# Altium PCB HGCD.PcbDoc
Units mm, origin at the board's own origin, x right, y up, seen from the top; angles counter-clockwise.
Board outline 152.4 x 101.6 mm, 4 copper layers (Top layer, Ground Plane, Power Plane, Bottom layer), stack 0.844 mm thick; 79 components, 62 nets, 344 pads, 24 vias.
Unrouted connection lines stored in the file: 63.
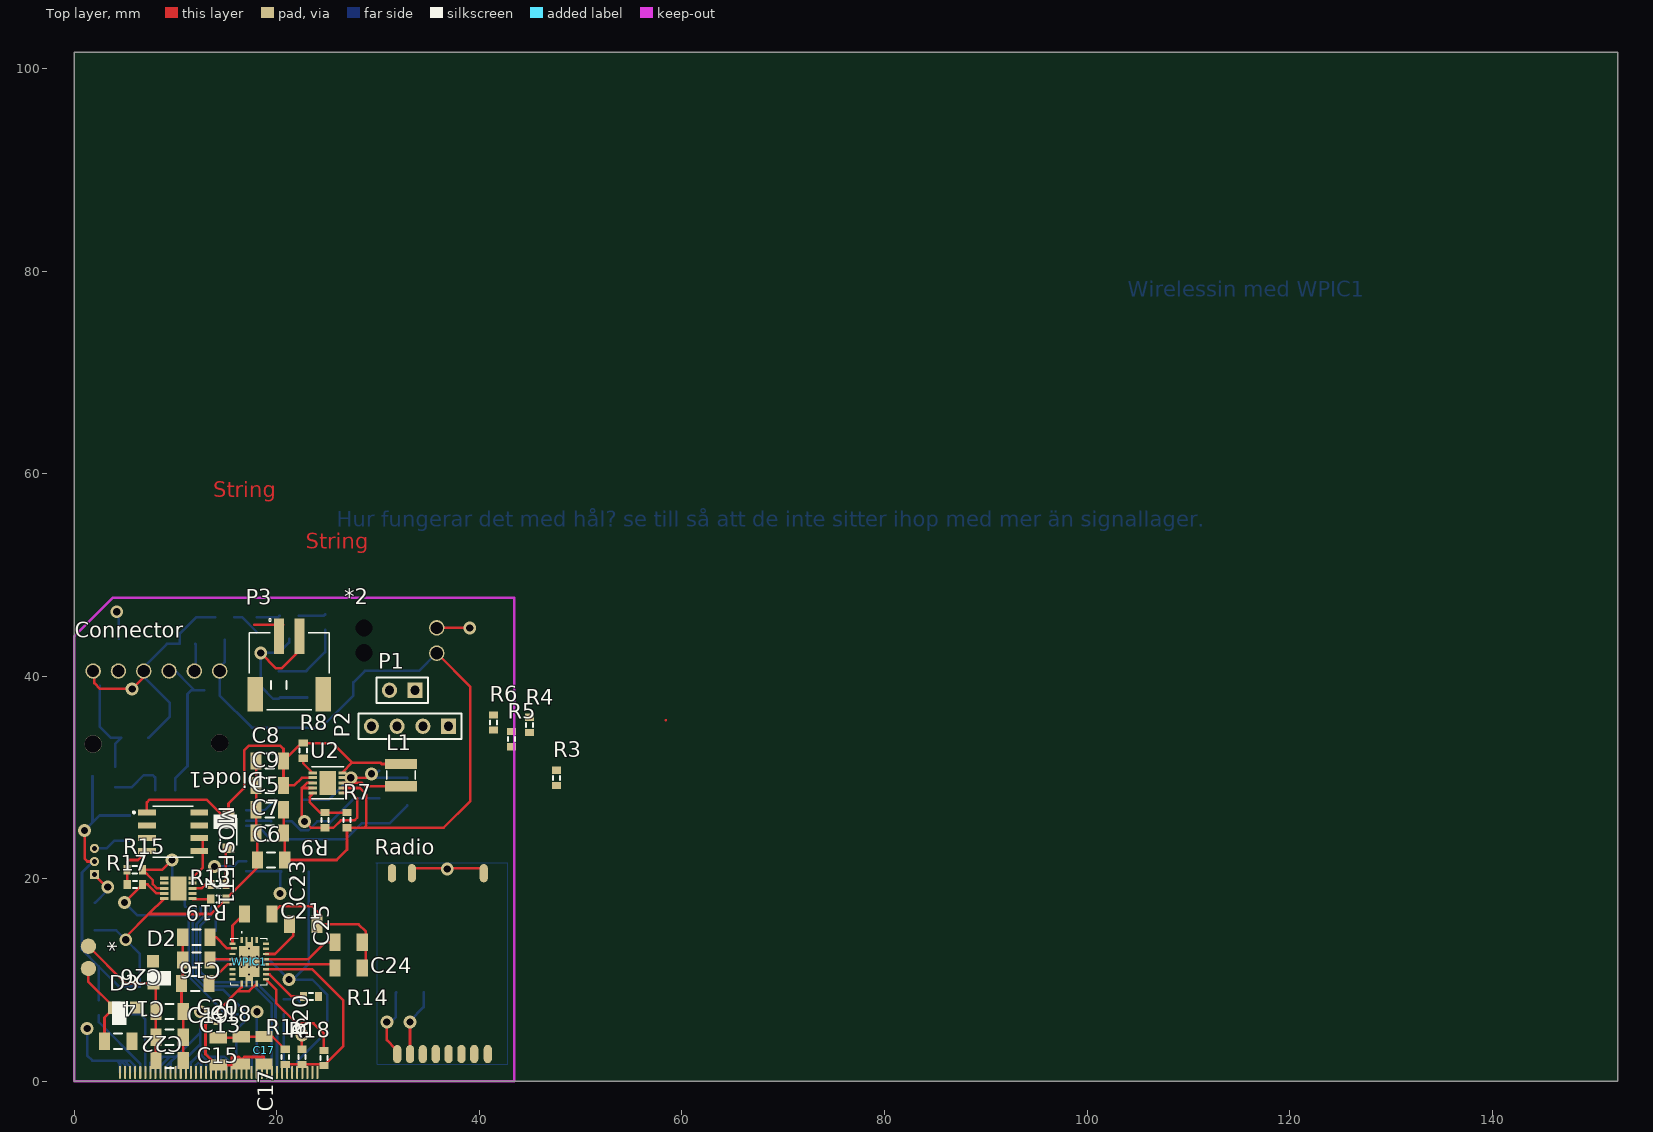
[diagram p0: Top layer view]
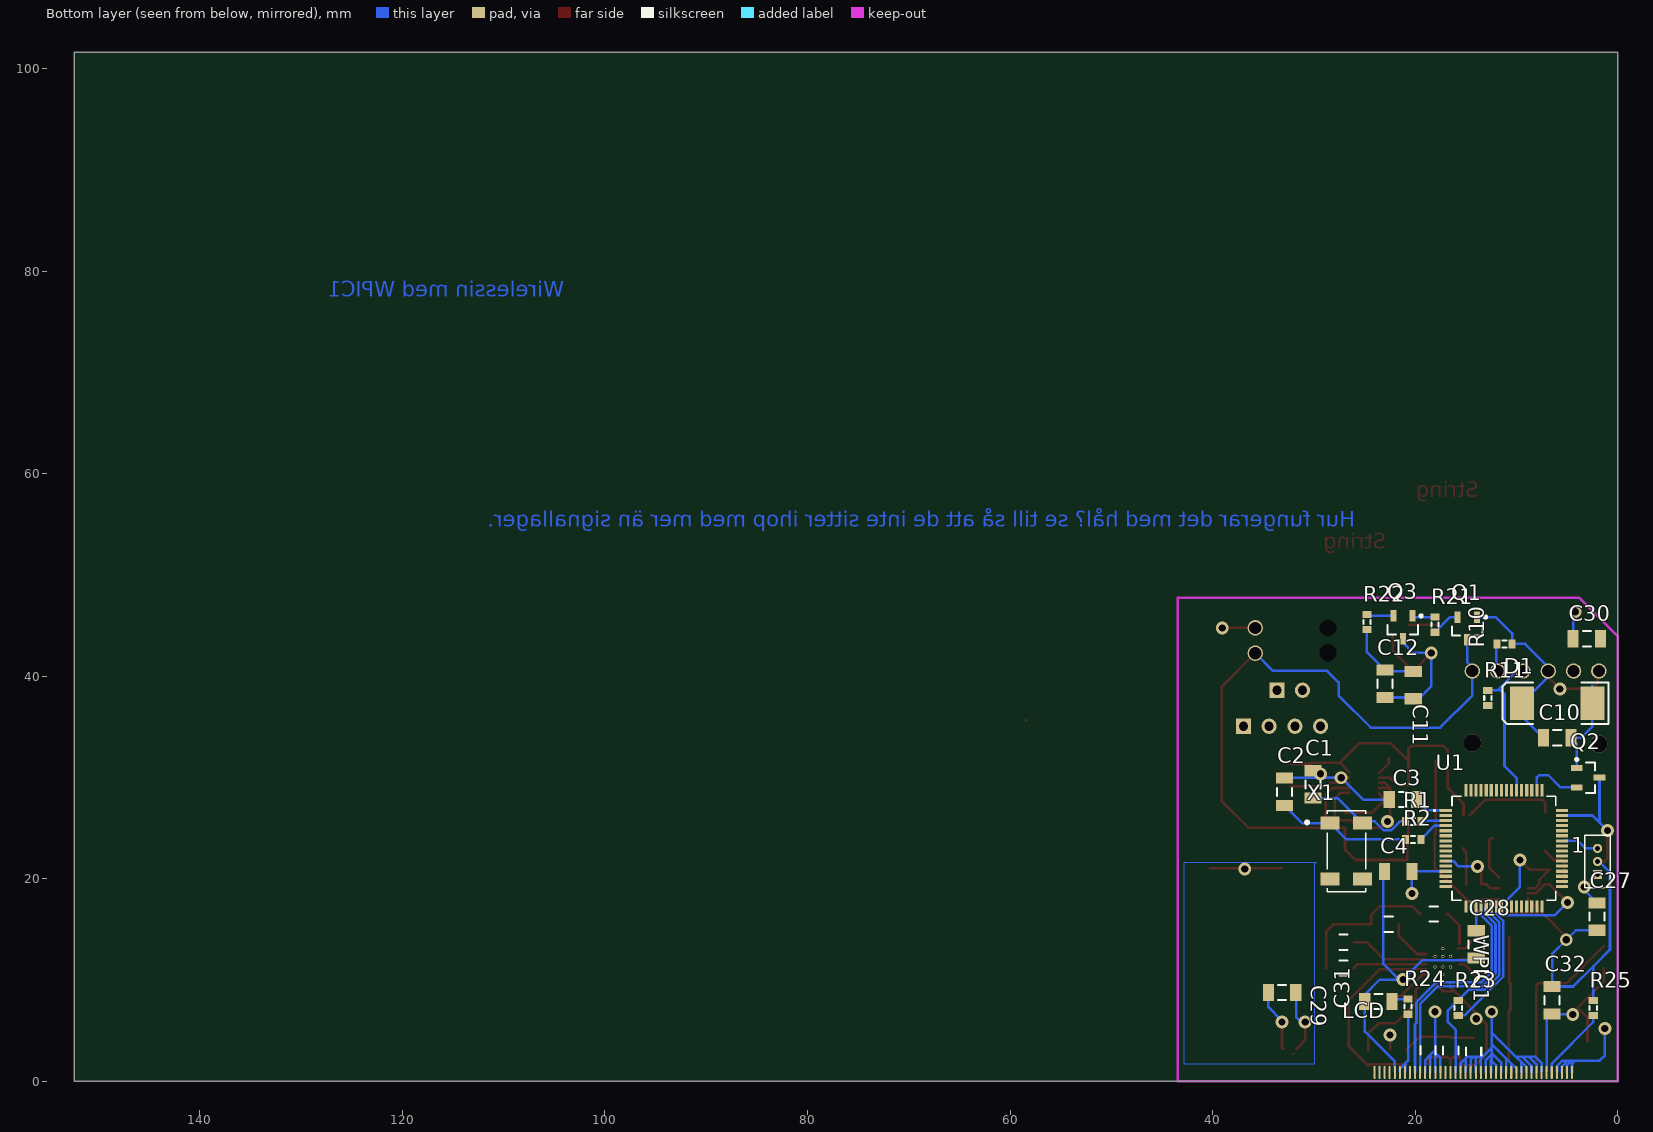
[diagram p1: Bottom layer view, seen from below]
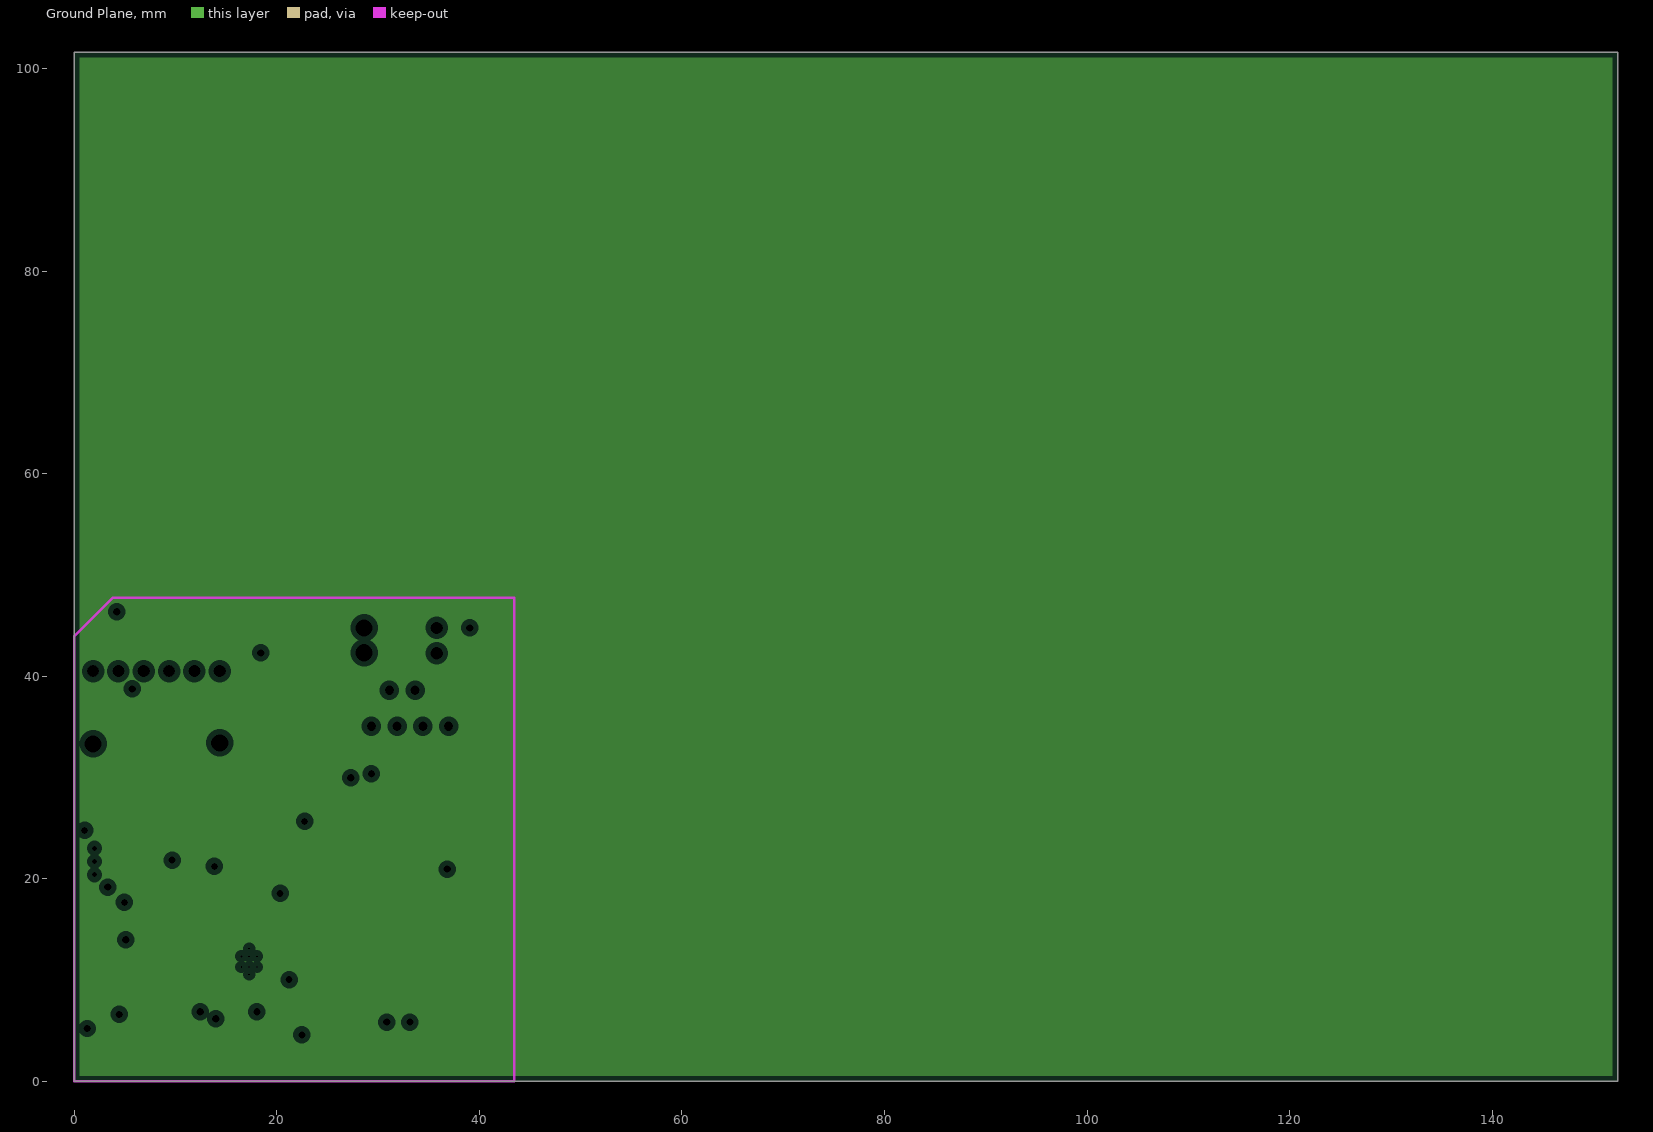
[diagram p2: Ground Plane, clearances drawn from the general rule]
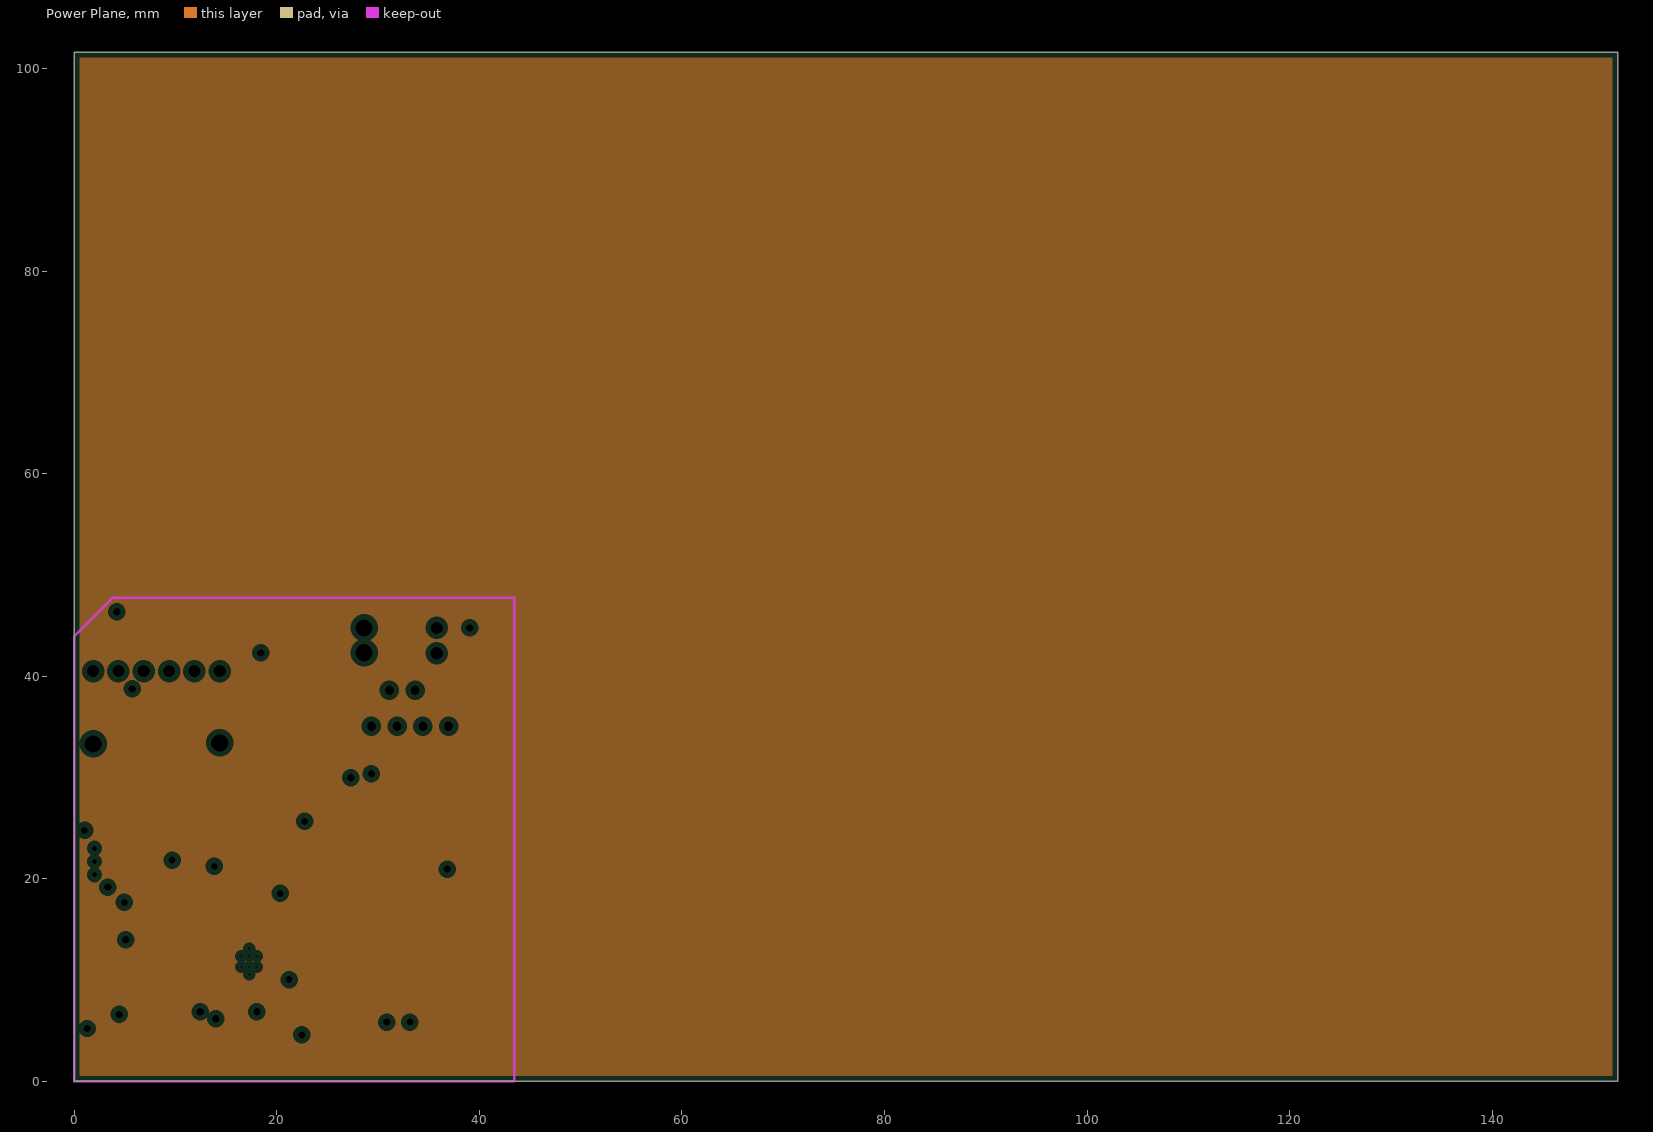
[diagram p3: Power Plane, clearances drawn from the general rule]

## Layer stack, top to bottom
Top Solder: solder mask 0.0102, Solder Resist, Dk 3.5
Top layer: signal copper 0.0356
Dielectric 1: core 0.32, FR-4, Dk 4.8
Ground Plane: plane copper 0.036
Dielectric 3: prepreg 0.127, Dk 4.2
Power Plane: plane copper 0.036
Dielectric 4: core 0.254, Dk 4.2
Bottom layer: signal copper 0.0356
Bottom Solder: solder mask 0.0102, Solder Resist, Dk 3.5

## Board outline
0,0 152.4,0 152.4,101.6 0,101.6

## Design rules (kind name [scope] priority, off if disabled: settings)
Clearance [All] p1: gap=0.127 ignorepadtopadclearanceinfootprint=FALSE
PlaneClearance [All] p1: clearance=0.508
PlaneConnect [All] p1: planeconnectstyle=Relief reliefexpansion=0.508 reliefentries=4 reliefconductorwidth=0.254 reliefairgap=0.254
PolygonConnect [All] p1: connectstyle=Relief reliefconductorwidth=0.254 reliefentries=4 polygonreliefangle="90 Angle" airgapwidth=0.254
RoomDefinition ZigBee [InComponentClass('ZigBee')] p1: confinementstyle=ConfineIn formatcopy=TRUE lockcomponents=FALSE outline 153.543,91.821 169.672,91.821 169.672,115.57 153.543,115.57
RoomDefinition WCcircuit [InComponentClass('WCcircuit')] p2: confinementstyle=ConfineIn formatcopy=TRUE lockcomponents=FALSE outline 153.543,79.375 352.806,79.375 352.806,90.551 153.543,90.551
RoomDefinition TPS6120x [InComponentClass('TPS6120x')] p3: confinementstyle=ConfineIn formatcopy=TRUE lockcomponents=FALSE outline 153.543,71.247 224.028,71.247 224.028,78.105 153.543,78.105
RoomDefinition "TFT LCD ER-TFT018-2" [InComponentClass('TFT LCD ER-TFT018-2')] p4: confinementstyle=ConfineIn formatcopy=TRUE lockcomponents=FALSE outline 154.178,46.597 176.784,46.597 176.784,69.838 154.178,69.838
RoomDefinition STM32 [InComponentClass('STM32')] p5: confinementstyle=ConfineIn formatcopy=TRUE lockcomponents=FALSE outline 153.543,28.829 220.98,28.829 220.98,45.593 153.543,45.593
RoomDefinition Magnetometer [InComponentClass('Magnetometer')] p6: confinementstyle=ConfineIn formatcopy=TRUE lockcomponents=FALSE outline 153.289,21.814 157.861,21.814 157.861,27.529 153.289,27.529
RoomDefinition connectors [InComponentClass('connectors')] p7: confinementstyle=ConfineIn formatcopy=TRUE lockcomponents=FALSE outline 153.543,1.524 201.295,1.524 201.295,20.574 153.543,20.574
RoutingVias [All] p1: holewidth=0.711 width=1.27 viastyle="Through Hole" minholewidth=0.711 minwidth=1.27 maxholewidth=0.711 maxwidth=1.27
SolderMaskExpansion [All] p1: expansion=0.102
Width [All] p1: maxlimit=0.254 minlimit=0.254 preferedwidth=0.254
28 further rules are at their usual default settings.

## Classes and differential pairs
component class ZigBee: C29 Radio
component class WCcircuit: 2 * C11 C12 C13 C14 C15 C16 C17 C18 C19 C20 C21 C22 C23 C24 C25 C26 D2 D3 Diode1 MOSFET1 P3 R13 R14 R15 R16 R17 R18 R19 R20 WPIC1
component class TPS6120x: C5 C6 C7 C8 C9 L1 Q1 Q3 R7 R8 R9 R21 R22 U2
component class "TFT LCD ER-TFT018-2": C31 C32 LCD R23 R24 R25
component class STM32: C1 C2 C3 C4 C28 P1 P2 R1 R2 R3 R4 R5 R6 U1 X1
component class Magnetometer: 1 C27
component class connectors: *2 C10 C30 Connector D1 Q2 R10 R11

## Components (designator, comment, footprint, x,y, rotation, side; value= is the part's Value field where it differs from the comment)
1 "magnometer" SIP-3 1.993,20.395 r90 bottom
2 "MCP73837T-FCI/MF" DFN300X300X100-11N 10.287,19.05 r0 top
* "WirelessIn" WIRELESSIN 1.397,12.23 r180 top
*2 "Connector button" BUTTON_CONNECTOR 35.789,42.266 r90 top
C1 "Cap Semi" C1206 30.099,29.312 r270 bottom value=100pF
C2 "Cap Semi" C1206 32.893,28.575 r270 bottom value=100pF
C3 "Cap Semi" C1206 21.209,27.813 r180 bottom value=100pF
C4 "Cap Semi" C1206 21.668,20.701 r180 bottom value=100pF
C5 "Cap Semi" C1206 19.304,26.797 r180 top value=100pF
C6 "Cap Semi" C1206 19.431,21.844 r0 top value=100pF
C7 "Cap Semi" C1206 19.304,24.511 r0 top value=100pF
C8 "Cap Semi" C1206 19.304,31.623 r180 top value=100pF
C9 "Cap Semi" C1206 19.304,29.21 r0 top value=100pF
C10 "Cap Semi" C1206 5.969,33.909 r180 bottom value=100pF
C11 "Cap Semi" C1206 20.193,39.116 r90 bottom value=100pF
C12 "Cap Semi" C1206 22.987,39.243 r90 bottom value=100pF
C13 "Cap Semi" C1206 9.411,4.335 r0 top value=100pF
C14 "Cap Semi" C1206 11.938,9.652 r0 top value=100pF
C15 "Cap Semi" C1206 9.411,2.049 r0 top value=100pF
C16 "Cap Semi" C1206 12.065,14.224 r0 top value=100pF
C17 "Cap Semi" C1206 18.733,3.065 r90 top value=100pF
C18 "Cap Semi" C1206 16.478,3.04 r90 top value=100pF
C19 "Cap Semi" C1206 14.224,2.938 r90 top value=100pF
C20 "Cap Semi" C1206 9.411,6.875 r0 top value=100pF
C21 "Cap Semi" C1206 18.161,16.51 r180 top value=100pF
C22 "Cap Semi" C1206 4.331,3.954 r0 top value=100pF
C23 "Cap Semi" C1206 22.604,15.494 r180 top value=100pF
C24 "Cap Semi" C1206 27.086,11.176 r180 top value=100pF
C25 "Cap Semi" C1206 27.086,13.716 r180 top value=100pF
C26 "Cap Semi" C1206 12.065,11.97 r0 top value=100pF
C27 "Cap Semi" C1206 2.032,16.256 r90 bottom value=100pF
C28 "Cap Semi" C1206 13.97,13.509 r90 bottom value=100pF
C29 "Cap Semi" C1206 33.147,8.763 r0 bottom value=100pF
C30 "Cap Semi" C1206 3.048,43.688 r180 bottom value=100pF
C31 "Cap Semi" C1206 23.622,7.874 r180 bottom value=100pF
C32 "Cap Semi" C1206 6.477,8.001 r270 bottom value=100pF
Connector "ConnectorWtoB" CONNECTOR_WIRE_TO_PCB -0.643,40.504 r180 top
D1 "Diode" SMC 5.969,37.338 r0 bottom
D2 "DIODE  PTVS12S1UR" PTVS12S1UR 7.728,11.843 r0 top
D3 "DIODE  PTVS12S1UR" PTVS12S1UR 6.124,7.336 r270 top
Diode1 "Diod MBR0520L-TP" SOD3716X135N 15.228,24.638 r270 top
L1 "744025002" WE-TPC_2828 32.258,30.226 r180 top value=2.2uH
LCD "TFT LCD ER-TFT018-2" "LCD TFT DISPLAY" 14.012,2.768 r90 bottom
MOSFET1 "fds9431a" SOIC127P600X175-8N 9.76,24.638 r0 top
P1 "Header 2" HDR1X2 33.655,38.608 r180 top
P2 "Header 4" HDR1X4 36.957,35.052 r180 top
P3 "S2B-PH-K-S(LF)(SN)" JST_S2B-PH-K-S(LF)(SN) 20.825,40.142 r180 top
Q1 "PNP" SOT-23B_N 14.859,44.704 r270 bottom
Q2 "QNPN" SOT-23B_N 2.921,29.972 r180 bottom
Q3 "QNPN" SOT-23B_N 21.209,44.831 r270 bottom
R1 "Res3" J1-0603 20.193,25.654 r0 bottom value=1K
R2 "Res3" J1-0603 20.193,23.876 r0 bottom value=1K
R3 "Res3" J1-0603 47.625,29.96 r270 top value=1K
R4 "Res3" J1-0603 44.958,35.191 r270 top value=1K
R5 "Res3" J1-0603 43.18,33.782 r270 top value=1K
R6 "Res3" J1-0603 41.402,35.433 r270 top value=1K
R7 "Res3" J1-0603 26.924,25.781 r270 top value=1K
R8 "Res3" J1-0603 22.606,32.639 r270 top value=1K
R9 "Res3" J1-0603 24.765,25.781 r90 top value=1K
R10 "Res3" J1-0603 11.178,43.18 r0 bottom value=1K
R11 "Res3" J1-0603 12.827,37.846 r270 bottom value=1K
R13 "Res3" J1-0603 14.224,17.977 r0 top value=1K
R14 "Res3" J1-0603 23.368,8.382 r0 top value=1K
R15 "Res3" J1-0603 5.969,20.885 r0 top value=1K
R16 "Res3" J1-0603 20.828,2.408 r90 top value=1K
R17 "Res3" J1-0603 5.981,19.431 r0 top value=1K
R18 "Res3" J1-0603 24.638,2.293 r270 top value=1K
R19 "Res3" J1-0603 14.224,19.431 r180 top value=1K
R20 "Res3" J1-0603 22.479,2.408 r270 top value=1K
R21 "Res3" J1-0603 18.034,45.085 r270 bottom value=1K
R22 "Res3" J1-0603 24.765,45.339 r90 bottom value=1K
R23 "Res3" J1-0603 15.748,7.239 r90 bottom value=1K
R24 "Res3" J1-0603 20.701,7.366 r270 bottom value=1K
R25 "Res3" J1-0603 2.413,7.239 r270 bottom value=1K
Radio "RF2401F20" RF2401F20 34.29,5.08 r90 top
U1 "STM32L476RX" LQFP64-10x10mm 11.233,22.987 r180 bottom value=Value
U2 "TPS61200DRCR" SON50P300X300X100-11N 25.019,29.464 r180 top
WPIC1 "bq51013B" CONTROLLER_MSP430FR2522IRHLT 17.272,11.811 r0 top
X1 "ABS25-32-768KHZ-T" XTAL_ABS25-32-768KHZ-T 26.797,22.733 r180 bottom

## Footprints (in the part's own frame and the unit in brackets; to place one, negate y for a bottom-side part, rotate by r counter-clockwise, add the part's x,y. Pads: shape width x height; smd on the part's side, far side on the other; paste and mask are expansions set on the pad)
BUTTON_CONNECTOR [mm]
  round 1.524 hole 1.2: 1(0,0) 2(2.5,0)
  round 1.524 hole 1.7: 25(0.04,7.18) 25(2.5,7.18)
C1206 [mm] "Chip Capacitor, Body 3.2x1.6mm, IPC High Density"
  rect 1.1x1.7 smd: 1(-1.35,0) 2(1.35,0)
  silkscreen extent -0.4,-0.75 0.4,0.75, body extent -1.7,-0.9 1.7,0.9, height 1.3
CONNECTOR_WIRE_TO_PCB [mm]
  round 1.524 hole 1.2: 1(-15,0) 2(-12.5,0) 3(-10,0) 4(-7.5,0) 5(-5,0) 6(-2.5,0)
  round 1.7 hole 1.7: hole1(-15,7.1) hole2(-2.5,7.2)
  Top layer lines w0.254: -15,0 -15,0
CONTROLLER_MSP430FR2522IRHLT [mm]
  rect 0.24x0.6 smd: 1(-0.75,2.15) 10(-0.75,-2.15) 11(0.75,-2.15) 20(0.75,2.15)
  rect 0.6x0.24 smd: 2(-1.65,1.75) 3(-1.5,1.3) 4(-1.65,0.75) 5(-1.65,0.25) 6(-1.65,-0.25) 7(-1.65,-0.75) 8(-1.65,-1.25) 9(-1.65,-1.75) 12(1.65,-1.75) 13(1.65,-1.25) 14(1.65,-0.75) 15(1.65,-0.25) 16(1.65,0.25) 17(1.65,0.75) 18(1.65,1.25) 19(1.65,1.75)
  round 0.3 hole 0.2: 21(-0.775,-0.525) 21(-0.775,0.525) 21(0,-1.275) 21(0,-0.525) 21(0,0.525) 21(0,1.275) 21(0.775,-0.525) 21(0.775,0.525)
  rect 0.2x0.525 smd: 21(-0.275,-2.187) 21(-0.275,2.187) 21(0.275,-2.187) 21(0.275,2.187)
  rect 0.75x0.4 smd: 21(0,-1.725) 21(0,1.725)
  rect 2.05x3.05 smd: 21(0,0)
  silkscreen extent -1.8,-2.3 1.8,2.95
DFN300X300X100-11N [mil]
  rect 32x12 smd: 1(-55,39) 2(-55,20) 3(-55,0) 4(-55,-20) 5(-55,-39) 6(55,-39) 7(55,-20) 8(55,0) 9(55,20) 10(55,39)
  rect 62x93 smd: 11(0,0)
HDR1X2 [mm] "Connector; Header; 2 Position"
  rect 1.5x1.5 hole 0.9: 1(0,0)
  round 1.5 hole 0.9: 2(2.54,0)
  silkscreen extent -1.27,-1.27 3.81,1.27
HDR1X4 [mm] "Connector; Header; 4 Position"
  rect 1.5x1.5 hole 0.9: 1(0,0)
  round 1.5 hole 0.9: 2(2.54,0) 3(5.08,0) 4(7.62,0)
  silkscreen extent -1.27,-1.27 8.89,1.27
J1-0603 [mm] "Chip Resistor, Body 1.6x0.8mm, IPC High Density"
  rect 0.7x0.9 smd: 1(-0.75,0) 2(0.75,0)
  silkscreen extent -0.2,-0.35 0.2,0.35, body extent -0.85,-0.48 0.85,0.48, height 0.9
JST_S2B-PH-K-S(LF)(SN) [mm]
  rect 1x3.5 smd: 1(0.6,-3.8) 2(-1.4,-3.8)
  rect 1.5x3.4 smd: P1(2.95,1.95) P2(-3.75,1.95)
  silkscreen extent -4.35,-5.53 3.55,3.45
"LCD TFT DISPLAY" [mm]
  rrect50% 1.25x0.2 all layers, no hole: 1(-1.9,10) 2(-1.9,9.5) 3(-1.9,9) 4(-1.9,8.5) 5(-1.9,8) 6(-1.9,7.5) 7(-1.9,7) 8(-1.9,6.5) 9(-1.9,6) 10(-1.9,5.5) 11(-1.9,5) 12(-1.9,4.5) 13(-1.9,4) 14(-1.9,3.5) 15(-1.9,3) 16(-1.9,2.5) 17(-1.9,2) 18(-1.9,1.5) 19(-1.9,1) 20(-1.9,0.5) 21(-1.9,0) 22(-1.9,-0.5) 23(-1.9,-1) 24(-1.9,-1.5) 25(-1.9,-2) 26(-1.9,-2.5) 27(-1.9,-3) 28(-1.9,-3.5) 29(-1.9,-4) 30(-1.9,-4.5) 31(-1.9,-5) 32(-1.9,-5.5) 33(-1.9,-6) 34(-1.9,-6.5) 35(-1.9,-7) 36(-1.9,-7.5) 37(-1.9,-8) 38(-1.9,-8.5) 39(-1.9,-9) 40(-1.9,-9.5)
  rect 3x2 on Bottom Solder: SMD1(0.3,11.6) SMD2(0.4,-11.1)
LQFP64-10x10mm [mm]
  rect 1.194x0.305 smd: 1(-5.75,3.75) 2(-5.75,3.25) 3(-5.75,2.75) 4(-5.75,2.25) 5(-5.75,1.75) 6(-5.75,1.25) 7(-5.75,0.75) 8(-5.75,0.25) 9(-5.75,-0.25) 10(-5.75,-0.75) 11(-5.75,-1.25) 12(-5.75,-1.75) 13(-5.75,-2.25) 14(-5.75,-2.75) 15(-5.75,-3.25) 16(-5.75,-3.75) 33(5.75,-3.75) 34(5.75,-3.25) 35(5.75,-2.75) 36(5.75,-2.25) 37(5.75,-1.75) 38(5.75,-1.25) 39(5.75,-0.75) 40(5.75,-0.25) 41(5.75,0.25) 42(5.75,0.75) 43(5.75,1.25) 44(5.75,1.75) 45(5.75,2.25) 46(5.75,2.75) 47(5.75,3.25) 48(5.75,3.75)
  rect 0.305x1.194 smd: 17(-3.75,-5.75) 18(-3.25,-5.75) 19(-2.75,-5.75) 20(-2.25,-5.75) 21(-1.75,-5.75) 22(-1.25,-5.75) 23(-0.75,-5.75) 24(-0.25,-5.75) 25(0.25,-5.75) 26(0.75,-5.75) 27(1.25,-5.75) 28(1.75,-5.75) 29(2.25,-5.75) 30(2.75,-5.75) 31(3.25,-5.75) 32(3.75,-5.75) 49(3.75,5.75) 50(3.25,5.75) 51(2.75,5.75) 52(2.25,5.75) 53(1.75,5.75) 54(1.25,5.75) 55(0.75,5.75) 56(0.25,5.75) 57(-0.25,5.75) 58(-0.75,5.75) 59(-1.25,5.75) 60(-1.75,5.75) 61(-2.25,5.75) 62(-2.75,5.75) 63(-3.25,5.75) 64(-3.75,5.75)
  silkscreen extent -6.93,-5.13 5.13,5.13, body extent 0,0 0.25,0.25, height 0.25
PTVS12S1UR [mm]
  rect 1.2x1.2 smd: A(0.06,0) C(0.08,-2.174)
  Top layer lines w0.025: 0,-2.17 0.08,-2.174 ; 0.03,0 0.06,0
  silkscreen extent -0.5,-2.36 1.78,-1
RF2401F20 [mm]
  oval 1.8x0.8 smd: 1(-2.4,2.4) 2(-2.4,1.14) 3(-2.4,-0.12) 4(-2.39,-1.4) 5(-2.39,-2.67) 6(-2.39,-3.94) 7(-2.39,-5.2) 8(-2.39,-6.54) 9(15.46,2.92) 10(15.46,0.96) 11(15.46,-6.14)
  Top layer region: -5.1,4.9
  Top layer lines w0.025: -2.4,2.48 -2.4,2.4 ; -2.4,2.09 -2.4,2.163 ; -2.4,2.4 -2.4,2.163 ; -2.4,2.4 -2.4,2.163
  Bottom layer lines w0.025: -3.4,4.4 16.4,4.4 16.5,4.5 16.5,-8.5 -3.4,-8.5 ; -3.39,4.37 -3.39,-8.53
SIP-3 [mm]
  rect 0.9x0.9 hole 0.5: 1(0,0)
  round 0.9 hole 0.5: 2(1.3,0) 3(2.6,0)
  silkscreen extent -1.27,-1.27 3.9,1.27
SMC [mm] "DO-214-AB/SMC; 2 C-Bend Leads; Body 7.9 x 5.9 mm, inc. leads (LxW)"
  rect 2.4x3.3 smd: 1(-3.475,0) 2(3.475,0)
  silkscreen extent -5.07,-2.05 5.43,2.05
SOD3716X135N [mm]
  rect 0.91x1.22 smd: A(1.635,0) C(-1.635,0)
  silkscreen extent -1.66,-1.48 1.35,0.8
SOIC127P600X175-8N [mm]
  rect 1.75x0.59 smd: 1(-2.585,1.905) 2(-2.585,0.635) 3(-2.585,-0.635) 4(-2.585,-1.905) 5(2.585,-1.905) 6(2.585,-0.635) 7(2.585,0.635) 8(2.585,1.905)
  silkscreen extent -3.97,-2.5 2,2.5
SON50P300X300X100-11N [mil]
  rect 32x12 smd: 1(-58,39) 2(-58,20) 3(-58,0) 4(-58,-20) 5(-58,-39) 6(58,-39) 7(58,-20) 8(58,0) 9(58,20) 10(58,39)
  rect 65x94 smd: 11(0,0)
  silkscreen extent -62,-62 62,62
SOT-23B_N [mm] "SOT23, 3-Leads, Body 2.9x1.3mm, Pitch 0.95mm, Lead Span 2.4mm, IPC Medium Density"
  rect 1.15x0.6 smd: 1(-1.125,0.95) 2(-1.125,-0.95) 3(1.125,0)
  silkscreen extent -1.25,-1.5 0.7,1.92, body extent -0.7,-1.5 0.7,1.5, height 1.14
WE-TPC_2828 [mm] "Power Inductor, SMD, 2-Leads, body 2.8x2.8mm"
  rect 3.2x1 smd: 1(0,1.1) 2(0,-1.1)
  silkscreen extent -1.4,-0.43 1.4,0.43, body extent -1.4,-1.4 1.4,1.4, height 2.82
WIRELESSIN [mil]
  round 60 smd: 1(0,43.31) 2(0,-43.31)
XTAL_ABS25-32-768KHZ-T [mm]
  rect 1.9x1.3 smd: 1(-1.6,2.75) 2(-1.6,-2.75) 3(1.6,-2.75) 4(1.6,2.75)
  silkscreen extent -4.02,-4 1.9,4

## Part data
2: "MCP73837 Series 6 V Linear Battery Charge Controller Surface Mount - DFN-10", Package="DFN-10 Microchip", Availability=Good, MF=Microchip, MP=MCP73837T-FCI/MF, Price="0.98 USD", SnapEDA_Link=https://www.snapeda.com/symbols-footprints/MCP73837T-FCI/MF/Microchip/view-part/?ref=snap
C1 C2 C3 C4 C5 C6 C7 C8 C9 C10 C11 C12 C13 C14 C15 C16 C17 C18 C19 C20 C21 C22 C23 C24 C25 C26 C27 C28 C29 C30 C31 C32: "Capacitor (Semiconductor SIM Model)", LatestRevisionDate=29-May-2009, LatestRevisionNote="IPC-7351 Footprint Added.", PackageDescription="Chip Capacitor", PackageReference=C1206, Published=8-Jun-2000, Publisher="Altium Limited"
D1: "Default Diode", Code_JEDEC=DO-214-AB, LatestRevisionDate=17-Jul-2002, LatestRevisionNote="Re-released for DXP Platform.", PackageDescription="DO-214-AB/SMC; 2 C-Bend Leads; Body 7.9 x 5.9 mm, inc. leads (LxW)", PackageReference=SMC, PackageVersion=Sep-1996, Published=8-Jun-2000, Publisher="Altium Limited"
L1: "WE-TPC SMD Shielded Tiny Power Inductor, size 2828, 1.8A, 57mO, 2.2uH", DC Resistance=57mO, Rated Current=1.8A, ComponentLink1Description=Manufacturer, ComponentLink1URL=http://www.we-online.de, ComponentLink2Description=Datasheet, ComponentLink2URL=http://katalog.we-online.de/pbs/datasheet/744025002.pdf, Part Number=744025002, Published Date="July 2017", Publisher="Wurth Elektronik", Size=2828
P1: "Header, 2-Pin", LatestRevisionDate=17-Jul-2002, LatestRevisionNote="Re-released for DXP Platform.", Publisher="Altium Limited"
P2: "Header, 4-Pin", LatestRevisionDate=17-Jul-2002, LatestRevisionNote="Re-released for DXP Platform.", Publisher="Altium Limited"
P3: "Header Side Entry 2way", Package=None, Availability=Good, MF=JST, MP="S2B-PH-K-S (LF)(SN)", Price="0.12 USD", SnapEDA_Link=https://www.snapeda.com/symbols-footprints/S2B-PH-K-S%20%28LF%29%28SN%29/JST/view-part/?ref=snap
Q1: "PNP Bipolar Transistor", LatestRevisionDate=29-May-2009, LatestRevisionNote="IPC-7351 Footprint Added.", PackageDescription="3-Pin SOT-23 Package 0.95 mm Pitch, 2.4 mm Lead Span", PackageReference=SOT-23B, PackageVersion=Aug-1999, Published=8-Jun-2000, Publisher="Altium Limited"
Q2 Q3: "NPN Bipolar Transistor", LatestRevisionDate=29-May-2009, LatestRevisionNote="IPC-7351 Footprint Added.", PackageDescription="3-Pin SOT-23 Package 0.95 mm Pitch, 2.4 mm Lead Span", PackageReference=SOT-23B, PackageVersion=Aug-1999, Published=8-Jun-2000, Publisher="Altium Limited"
R1 R2 R3 R4 R5 R6 R7 R8 R9 R10 R11 R13 R14 R15 R16 R17 R18 R19 R20 R21 R22 R23 R24 R25: "Resistor", LatestRevisionDate=29-May-2009, LatestRevisionNote="IPC-7351 Footprint Added.", PackageDescription="Chip Resistor", PackageReference=J1-0603, Published=8-Jun-2000, Publisher="Altium Limited"
U1: "Imported", Manufacturer_Part_Number=stm32l476rx, Copyright="Copyright (C) 2016 Accelerated Designs. All rights reserved", RefDes=RefDes, Type=Type, Vendor="ST Microelectronics"
U2: "0.3V Input Voltage Boost Converter with 1.3A Switches and 'Down Mode' in 3x3 QFN 10-VSON -40 to 85", Package="VFDFN-10 Texas Instruments", Availability=Good, MF="Texas Instruments", MP=TPS61200DRCR, Price="1.71 USD", SnapEDA_Link=https://www.snapeda.com/symbols-footprints/TPS61200DRCR/Texas%20Instruments/view-part/?ref=snap
X1: Package=None, Availability=Unavailable, MF=Abracon, MP=ABS25-32-768KHZ-T, Price=None, SnapEDA_Link=https://www.snapeda.com/symbols-footprints/ABS25-32-768KHZ-T/Abracon/view-part/?ref=snap

## Via types
v1: diameter 1.27/1.27 (per signal layer), hole 0.711, Top layer to Bottom layer, 15 vias
v2: diameter 1.27, hole 0.711, Top layer to Bottom layer, 9 vias

## Nets (pads, with @x,y where several pads share a name; then routed paths per layer and width w, separated by ;. In a path a pad name is that pad's centre, name@x,y a point inside that pad or via, vN(x,y) a via of type N, cw(c..) or ccw(c..) an arc to the next point about the centre after c; other vN are vias at no path point)
"CS LCD": LCD.9 U1.20 | length 22.5
  Bottom layer w0.254: U1.20 13.483,16.404 12.446,15.367 12.446,10.795 13.462,9.779 17.907,9.779 19.866,7.82 19.866,5.788 20.012,5.642 LCD.9
GND: 1.2 2.5 C1.1 C2.1 C3.1 C4.1 C5.2 C6.1 C7.1 C8.2 C9.1 C11.1 C12.1 C17.1 C18.1 C19.1 C27.1 C28.1 C29.2 C30.1 C31.1 C32.1 D2.A D3.A LCD.5 LCD.11 LCD.12 LCD.13 LCD.14 LCD.16 LCD.18 LCD.19 LCD.20 LCD.21 LCD.22 LCD.23 LCD.24 LCD.25 LCD.26 LCD.27 LCD.28 LCD.29 LCD.30 LCD.31 LCD.32 LCD.33 LCD.34 LCD.37 LCD.38 LCD.39 LCD.40 P3.2 Q2.3 Q3.3 R9.1 R11.2 R13.2 R14.2 R20.1 R25.1 Radio.2 Radio.10 Radio.11 U1.18 U1.31 U1.47 U1.63 U2.1 U2.4 U2.8 U2.9 U2.11 WPIC1.9 WPIC1.10 WPIC1.11 WPIC1.20 | length 256.8
  Top layer w0.254: v1(1.016,24.765) 1.016,21.971 1.292,21.695 1.2 ; v1(5.08,13.97) 5.08,14.249 7.341,16.51 ; 2.5 7.341,16.51 ; WPIC1.10 16.522,9.283 16.129,8.89 ; C8.2 C9.1 C5.2 C7.1 18.081,24.384 C6.1 18.081,21.084 R13.2 13.507,16.51 7.341,16.51 ; WPIC1.11 17.251,8.89 16.129,8.89 ; v1(18.415,42.291) 19.939,40.767 20.447,40.767 22.225,42.545 P3.2 ; C17.1 18.708,1.69 18.708,2.391 16.783,2.391 16.531,2.139 16.531,1.69 16.493,1.69 16.493,2.139 16.241,2.391 15.599,2.391 15.531,2.323 15.531,1.588 C19.1 14.033,1.588 12.954,2.667 12.954,5.588 13.54,6.174 v1(13.97,6.174) 13.97,6.731 16.129,8.89 ; R20.1 v2(22.479,4.572) ; U2.9 22.479,28.956 ; U2.8 22.987,29.464 22.479,28.956 ; U2.1 27.407,28.473 ; U2.4 v1(27.305,29.972) 28.956,29.972 v1(29.337,30.353) ; 27.407,28.448 27.432,28.448 27.94,27.94 27.94,26.035 27.667,25.762 26.316,25.762 25.585,25.031 R9.1 23.356,25.031 v1(22.733,25.654) 22.479,25.908 22.479,28.956 ; Radio.2@32.988,3.188 33.147,3.347 v2(33.147,5.842) ; Radio.10@33.168,21.048 Radio.11@40.268,21.048
  Bottom layer w0.254: v1(1.016,24.765) 1.796,25.545 ; v1(1.27,5.207) 1.27,2.54 1.778,2.032 4.191,2.032 ; Q2.3@1.796,30.099 1.796,25.545 ; 1.2 1.854,21.695 0.762,20.603 0.762,12.998 2.413,11.347 ; C27.1 4.144,14.906 v1(5.08,13.97) 6.477,12.573 C32.1 4.409,9.351 2.413,11.347 ; R25.1 2.413,11.347 ; v1(4.191,46.355) 4.398,46.148 C30.1 ; LCD.40 4.512,1.711 4.191,2.032 ; LCD.39 5.012,1.592 4.572,2.032 ; U1.47 2.488,26.237 1.796,25.545 ; LCD.38 5.512,1.473 4.953,2.032 ; LCD.37@5.996,0.995 5.996,1.497 5.461,2.032 4.953,2.032 ; LCD.34@7.52,0.995 7.52,1.805 8.128,2.413 8.763,2.413 ; LCD.33 8.012,1.662 8.763,2.413 ; LCD.32 8.512,1.527 9.398,2.413 ; LCD.31 9.012,1.392 9.512,1.892 ; LCD.30 9.512,1.892 ; LCD.29 10.012,1.249 10.512,1.749 ; LCD.28 10.512,1.749 ; LCD.27 11.012,2.249 ; LCD.26 11.512,1.86 12.446,2.794 ; LCD.25 12.012,1.577 12.446,2.011 12.446,2.794 ; v1(12.446,6.858) 12.446,4.826 ; 12.509,2.603 13.012,2.101 LCD.23 ; LCD.24 12.512,2.093 ; LCD.22 13.512,2.236 13.335,2.413 ; C28.1 13.97,11.932 19.31,11.932 v1(21.209,10.033) 23.495,10.033 24.972,8.556 C31.1 24.972,4.906 22.012,1.946 22.012,1.448 22.02,1.44 LCD.5@22.02,0.995 ; LCD.21 14.012,2.244 13.843,2.413 ; LCD.20 14.512,2.125 14.224,2.413 ; LCD.19 15.012,2.26 ; LCD.18@15.504,0.868 15.504,1.768 15.012,2.26 ; LCD.14 17.512,2.272 18.012,2.772 ; LCD.13 18.012,2.772 ; v1(18.034,6.858) 18.034,3.048 ; LCD.12 18.512,2.57 ; LCD.11 19.012,2.07 18.512,2.57 ; Q3.3 21.209,43.307 20.193,42.291 v1(18.415,42.291) 18.415,38.989 19.638,37.766 C11.1 20.32,37.893 C12.1 ; v1@21.717,10.16 23.147,11.59 C4.1@23.147,20.701 ; C3.1 25.146,27.813 v1(27.305,29.972) v1@29.409,29.972 ; C1.1 v1@29.409,29.972 ; C2.1 32.846,29.972 v1@29.409,29.972 ; v2(33.147,5.842) 33.147,5.969 34.497,7.319 C29.2 ; 4.191,2.032 4.572,2.032 ; 4.572,2.032 4.953,2.032 ; 8.763,2.413 9.398,2.413 ; 9.398,2.413 10.033,2.413 ; 9.512,1.892 10.033,2.413 ; 10.033,2.413 12.446,4.826 ; 10.512,1.749 11.012,2.249 ; 11.012,2.249 12.446,3.683 ; 12.446,2.794 12.446,3.238 ; 12.446,3.238 12.446,3.683 ; 12.446,3.238 12.509,3.238 13.335,2.413 ; 12.446,3.683 12.446,4.826 ; 13.335,2.413 13.843,2.413 ; 13.843,2.413 14.224,2.413 ; 14.224,2.413 14.859,2.413 15.012,2.26 ; 18.012,2.772 18.034,2.794 18.034,3.048 ; 18.034,3.048 18.512,2.57
  other v2: 36.83,20.955
"MISO LCD": LCD.17 R23.2 U1.22 | length 20.1
  Bottom layer w0.254: U1.22 12.483,16.482 11.684,15.683 11.684,10.479 13.146,9.017 14.72,9.017 R23.2 16.764,6.973 16.764,5.842 16.012,5.09 LCD.17 ; 16.002,6.235 16.012,6.225
"MOSI LCD": R23.1 U1.23 | length 13.7
  Bottom layer w0.254: U1.23 11.983,16.521 11.303,15.84 11.303,10.322 15.12,6.504 15.733,6.504 15.844,6.616 R23.1@16.16,6.616
Net1_3: 1.3 U1.42 | length 3.8
  Bottom layer w0.254: 1.3 3.183,22.995 3.925,23.737 U1.42
Net2_1: 2.1 C11.2 C12.2 Diode1.A MOSFET1.4 R15.1 R17.1 R19.1 R22.1 WPIC1.4 | length 15.9
  Top layer w0.254: R17.1 5.219,19.443 R15.1 5.219,21.602 5.461,21.844 6.286,21.844 MOSFET1.4 ; R19.1 14.974,22.634 15.212,22.872 15.228,22.872 Diode1.A
  Bottom layer w0.254: C11.2 22.86,40.466 C12.2 24.765,42.371 R22.1
Net2_3: 2.3 R15.2 U1.25 | length 11.7
  Top layer w0.254: 2.3 8.159,19.05 7.747,19.462 7.747,19.857 R15.2 8.693,20.885 v2(9.652,21.844)
  Bottom layer w0.254: v2(9.652,21.844) 9.652,19.177 10.89,17.939 10.89,17.331 U1.25
Net2_4: 2.4 R17.2 U1.24 | length 12.9
  Top layer w0.254: v2(4.953,17.653) R17.2 7.239,19.431 8.128,18.542 2.4
  Bottom layer w0.254: v2(4.953,17.653) 6.22,16.386 11.241,16.386 11.39,16.535 11.39,17.145 U1.24@11.577,17.145
Net2_6: 2.6 R13.1 | length 1.8
  Top layer w0.254: 2.6@11.684,18.009 11.716,17.977 R13.1
Net2_8: 2.8 R19.2 U1.11 | length 7.2
  Top layer w0.254: 2.8 12.573,19.05 12.954,19.431 R19.2 13.474,20.84 v2(13.843,21.209)
  Bottom layer w0.254: v2(13.843,21.209) 15.698,21.209 16.226,21.737 U1.11
Net2_10: 2.10 MOSFET1.6 P3.1 | length 7.4
  Top layer w0.254: 2.10@11.684,20.091 12.7,21.107 12.7,23.749 12.446,24.003 MOSFET1.6 ; 17.77,45.075 P3.1@20.609,45.075
Net*2_1: *2.1 C5.1 C6.2 C7.2 Connector.1 Q1.3 R7.2 U2.2 | length 80.7
  Top layer w0.254: C5.1 20.701,26.75 20.701,24.558 C7.2 20.781,24.384 C6.2 25.908,21.844 26.924,22.86 R7.2 28.587,25.031 ; U2.2 28.194,28.956 28.829,28.321 28.829,25.273 28.587,25.031 ; *2.1 39.116,38.939 39.116,27.686 36.461,25.031 28.587,25.031
  Bottom layer w0.254: Connector.1 14.357,38.094 17.526,34.925 24.384,34.925 27.559,38.1 27.559,39.37 28.702,40.513 34.037,40.513 *2.1 ; Connector.1@14.478,41.009 14.859,41.39 Q1.3
Net*_1: *.1 C22.1 D3.C WPIC1.19 | length 8.6
  Top layer w0.254: *.1 1.397,9.809 D3.C 2.981,6.287 C22.1
Net*_2: *.2 C13.1 C15.1 C20.1 D2.C | length 15.7
  Top layer w0.254: *.2 5.058,9.669 D2.C@7.811,9.669 ; D2.C@7.887,9.669 D2.C@7.811,9.669 ; C15.1 C13.1 C20.1 8.061,9.419 D2.C@7.811,9.669
NetC1_2: C1.2 R1.2 X1.4 | length 11
  Bottom layer w0.254: R1.2 21.476,25.654 22.365,24.765 23.101,24.765 23.99,25.654 25.026,25.654 X1.4 27.676,27.962 C1.2
NetC2_2: C2.2 R2.2 X1.1 | length 13.3
  Bottom layer w0.254: R2.2 26.79,23.876 X1.1 31.151,25.483 C2.2
NetC8_1: C8.1 C9.2 Diode1.C L1.2 MOSFET1.1 R8.1 U2.5 U2.7 | length 41.8
  Top layer w0.254: MOSFET1.1 7.175,27.54 7.448,27.813 13.065,27.813 14.605,26.273 ; Diode1.C 15.228,27.42 16.764,28.956 16.764,32.639 17.272,33.147 20.32,33.147 20.654,32.813 C8.1 ; U2.7 22.956,29.972 22.943,29.959 22.466,29.959 21.717,29.21 C9.2 C8.1 ; U2.5@26.492,30.505 27.44,31.453 ; L1.2 30.353,31.326 30.226,31.453 27.44,31.453 ; C8.1 22.42,33.389 R8.1 25.504,33.389 27.44,31.453
NetC10_2: C10.2 Connector.5 D1.1 Q2.1 | length 9.7
  Bottom layer w0.254: 2.494,39.025 D1.1 2.494,35.034 3.619,33.909 C10.2 4.046,33.336 Q2.1@4.046,31.049
NetC13_2: C13.2 C14.1 C15.2 C16.1 C20.2 C21.2 C22.2 C26.1 WPIC1.2 | length 15.8
  Top layer w0.254: C16.1 C26.1 10.715,9.779 C14.1 10.588,7.048 C20.2 C13.2 C15.2 ; WPIC1.2 15.622,15.368 16.764,16.51 C21.2
NetC14_2: C14.2 WPIC1.6 | length 3.1
  Top layer w0.254: C14.2 15.197,11.561 WPIC1.6
NetC16_2: C16.2 WPIC1.3 | length 2.8
  Top layer w0.254: C16.2 13.97,14.224 15.083,13.111 WPIC1.3
NetC17_2: C17.2 C18.2 C19.2 R16.2 WPIC1.18 | length 7.2
  Top layer w0.254: C19.2 16.376,4.288 C18.2 C17.2@18.708,4.39 ; C17.2 C17.2@18.708,4.39 ; R16.2 19.596,4.39 C17.2@18.708,4.39
NetC21_1: C21.1 C23.1 C24.1 C25.1 | length 14.8
  Top layer w0.254: C21.1 20.273,17.272 23.495,17.272 24.337,16.43 24.337,15.494 28.067,15.494 28.782,14.779 28.782,13.716 C24.1@28.782,11.176
NetC23_2: C23.2 WPIC1.17 | length 4.6
  Top layer w0.254: WPIC1.17 19.8,12.561 21.637,14.398 C23.2@21.637,15.494
NetC24_2: C24.2 WPIC1.15 | length 7.3
  Top layer w0.254: WPIC1.15 25.697,11.561 C24.2@26.082,11.176
NetC25_2: C25.2 WPIC1.16 | length 7.8
  Top layer w0.254: WPIC1.16 23.11,12.061 24.765,13.716 C25.2@26.082,13.716
NetC26_2: C26.2 WPIC1.5 | length 2.2
  Top layer w0.254: C26.2 13.506,12.061 WPIC1.5
NetConnector_2: Connector.2 R10.2 | length 2.2
  Bottom layer w0.254: R10.2@11.926,43.18 11.978,43.128 Connector.2@11.978,41.009
NetConnector_3: Connector.3 R11.1 U1.54 | length 16.1
  Bottom layer w0.254: Connector.3@9.478,41.009 11.879,38.608 R11.1@12.839,38.608 ; U1.54 9.983,29.922 11.176,31.115 11.176,38.227 11.545,38.596 R11.1
NetL1_1: L1.1 U2.3 | length 5.9
  Top layer w0.254: U2.3 28.404,29.464 28.742,29.126 L1.1
NetLCD_6: LCD.6 LCD.7 R24.2 | length 6.7
  Bottom layer w0.254: R24.2 20.701,2.041 20.993,1.749 ; LCD.7@21.012,0.995 20.993,1.014 20.993,1.749 ; LCD.6@21.512,0.995 21.512,1.23 20.993,1.749
NetLCD_36: LCD.36 R25.2 | length 7.2
  Bottom layer w0.254: R25.2 2.413,5.829 6.504,1.738 LCD.36@6.504,0.995
NetP1_1: P1.1 U1.14
NetP1_2: P1.2 U1.15
NetP2_1: P2.1 R3.1
NetP2_2: P2.2 R4.1
NetP2_3: P2.3 R5.1
NetP2_4: P2.4 R6.1
NetQ1_2: Q1.2 R21.2 | length 2.8
  Bottom layer w0.254: Q1.2 16.54,45.829 R21.2
NetQ2_2: Q2.2 U1.50 | length 5.8
  Bottom layer w0.254: Q2.2 5.654,29.022 6.858,30.226 7.747,30.226 7.983,29.99 U1.50
NetQ3_1: Q3.1 R21.1 | length 2.3
  Bottom layer w0.254: R21.1 20.138,45.835 Q3.1
NetQ3_2: Q3.2 R22.2 | length 2.7
  Bottom layer w0.254: Q3.2 24.632,45.956 R22.2
NetR1_1: R1.1 U1.3 | length 2.5
  Bottom layer w0.254: U1.3@16.979,25.737 19.36,25.737 R1.1
NetR2_1: R2.1 U1.4 | length 3
  Bottom layer w0.254: U1.4@16.979,25.237 18.082,25.237 R2.1
NetR7_1: R7.1 R9.2 U2.10 | length 5.4
  Top layer w0.254: 23.368,28.245 U2.10@23.546,28.423 ; U2.10 U2.10@23.546,28.423 ; R7.1 R9.2 24.269,26.531 23.241,27.559 23.241,28.067 23.546,28.372 U2.10@23.546,28.423
NetR8_2: R8.2 U2.6 | length 1.8
  Top layer w0.254: R8.2 22.606,31.394 U2.6
NetR14_1: R14.1 WPIC1.13 | length 4.6
  Top layer w0.254: WPIC1.13 19.284,10.561 21.463,8.382 R14.1
NetR16_1: R16.1 R18.2 R20.2 WPIC1.14 | length 20
  Top layer w0.254: WPIC1.14 23.483,11.061 26.543,8.001 26.543,3.448 R18.2 24.523,1.658 R20.2 R16.1
NetR18_1: R18.1 WPIC1.12 | length 10.4
  Top layer w0.254: WPIC1.12 19.939,9.044 19.939,7.742 21.966,5.715 23.622,5.715 24.638,4.699 R18.1
"RESET LCD": LCD.15 U1.41
"SCK LCD": LCD.10 U1.21 | length 22.5
  Bottom layer w0.254: U1.21 13.077,17.143 13.077,16.537 12.065,15.525 12.065,10.637 13.304,9.398 17.749,9.398 19.485,7.662 19.485,0.895 LCD.10
T_JTCK: R3.2 U1.49
T_JTMS: R4.2 U1.46
T_NRST: R5.2 U1.7
T_SWO: R6.2 U1.55
VCC: 1.1 *2.2 C3.2 C4.2 C10.1 C27.2 C28.2 C29.1 C30.2 C31.2 C32.2 Connector.4 Connector.6 D1.2 LCD.35 Q1.1 R10.1 R24.1 Radio.1 U1.1 U1.13 U1.19 U1.32 U1.64 | length 62
  Top layer w0.254: Connector.6@1.978,41.009 1.978,39.316 2.559,38.735 v1(5.715,38.735) 6.978,39.998 Connector.4@6.978,41.009 ; 1.1 1.993,20.359 v1@3.175,19.177 ; v1@2.921,19.177 v1@3.175,19.177 ; v1(3.302,19.177) v1@3.175,19.177 ; v2(30.861,5.842) 30.861,4.055 Radio.1@31.728,3.188 ; *2.2 v2(39.054,44.766) ; 58.411,35.649 58.42,35.64
  Bottom layer w0.254: 1.1 1.1@2.032,20.356 ; C27.2 3.302,18.876 v1(3.302,19.177) ; v1(4.445,6.604) 6.43,6.604 C32.2 7.012,6.116 LCD.35@7.012,0.995 ; C10.1 9.444,36.034 D1.2 6.978,39.804 6.978,41.009 9.149,43.18 R10.1 10.428,44.21 12.047,45.829 Q1.1 ; C28.2 13.979,14.868 U1.19@13.979,17.237 ; U1.13@16.979,20.737 U1.13 20.411,20.737 C4.2@20.447,20.701 ; U1.1@16.979,26.737 U1.1 18.783,26.737 C3.2 ; v2(20.318,18.54) C4.2 ; R24.1 22.03,8.116 C31.2 ; v2(30.861,5.842) 31.26,5.842 31.728,6.311 31.728,8.694 C29.1
"WirComm CE": Radio.3 U1.39
"WirComm CSN": Radio.4 U1.40
"WirComm IRQ": Radio.8 U1.38
"WirComm MISO": Radio.7 U1.52
"WirComm MOSI": Radio.6 U1.53
"WirComm SCK": Radio.5 U1.51
pads on no net: 2.2 2.7 2.9 2.11 *2.25 Connector.hole1 Connector.hole2 LCD.1 LCD.2 LCD.3 LCD.4 LCD.8 LCD.SMD1 LCD.SMD2 MOSFET1.2 MOSFET1.3 MOSFET1.5 MOSFET1.7 MOSFET1.8 P3.P1 P3.P2 Radio.9 U1.2 U1.5 U1.6 U1.8 U1.9 U1.10 U1.12 U1.16 U1.17 U1.26 U1.27 U1.28 U1.29 U1.30 U1.33 U1.34 U1.35 U1.36 U1.37 U1.43 U1.44 U1.45 U1.48 U1.56 U1.57 U1.58 U1.59 U1.60 U1.61 U1.62 WPIC1.1 WPIC1.7 WPIC1.8 WPIC1.21 X1.2 X1.3

## Polygon pours and split planes (outlines as drawn)
no net on Ground Plane (split plane): 151.89,0.51 0.51,0.51 0.51,101.09 151.89,101.09
no net on Power Plane (split plane): 151.89,0.51 0.51,0.51 0.51,101.09 151.89,101.09

## Keep-outs
Keep-Out Layer:
  lines w0.254: 0,0 0,43.942 3.81,47.752 43.434,47.752 43.434,0 0,0

## Other copper
Top layer:
  text "String" at 13.716,57.658 h1.52
  text "String" at 22.86,52.578 h1.52
Bottom layer:
  text "Wirelessin med WPIC1" at 104.013,77.47 h1.52
  text "Hur fungerar det med hål? se till så att de inte sitter ihop med mer än signallager." at 25.908,54.737 h1.52